# Altium PCB BEE-PC_EXP_V100.PcbDoc (part 1 of 7)
Units mm, origin at the board's own origin, x right, y up, seen from the top; angles counter-clockwise.
Board outline 180 x 79.98 mm, 6 copper layers (L1 TOP, L2 GND 1, L3 SIGNAL, L4 PWR, L5 GND 2, L6 BOT), stack 1.536 mm thick; 1146 components, 909 nets, 3933 pads, 1234 vias.
Unrouted connection lines stored in the file: 1783.
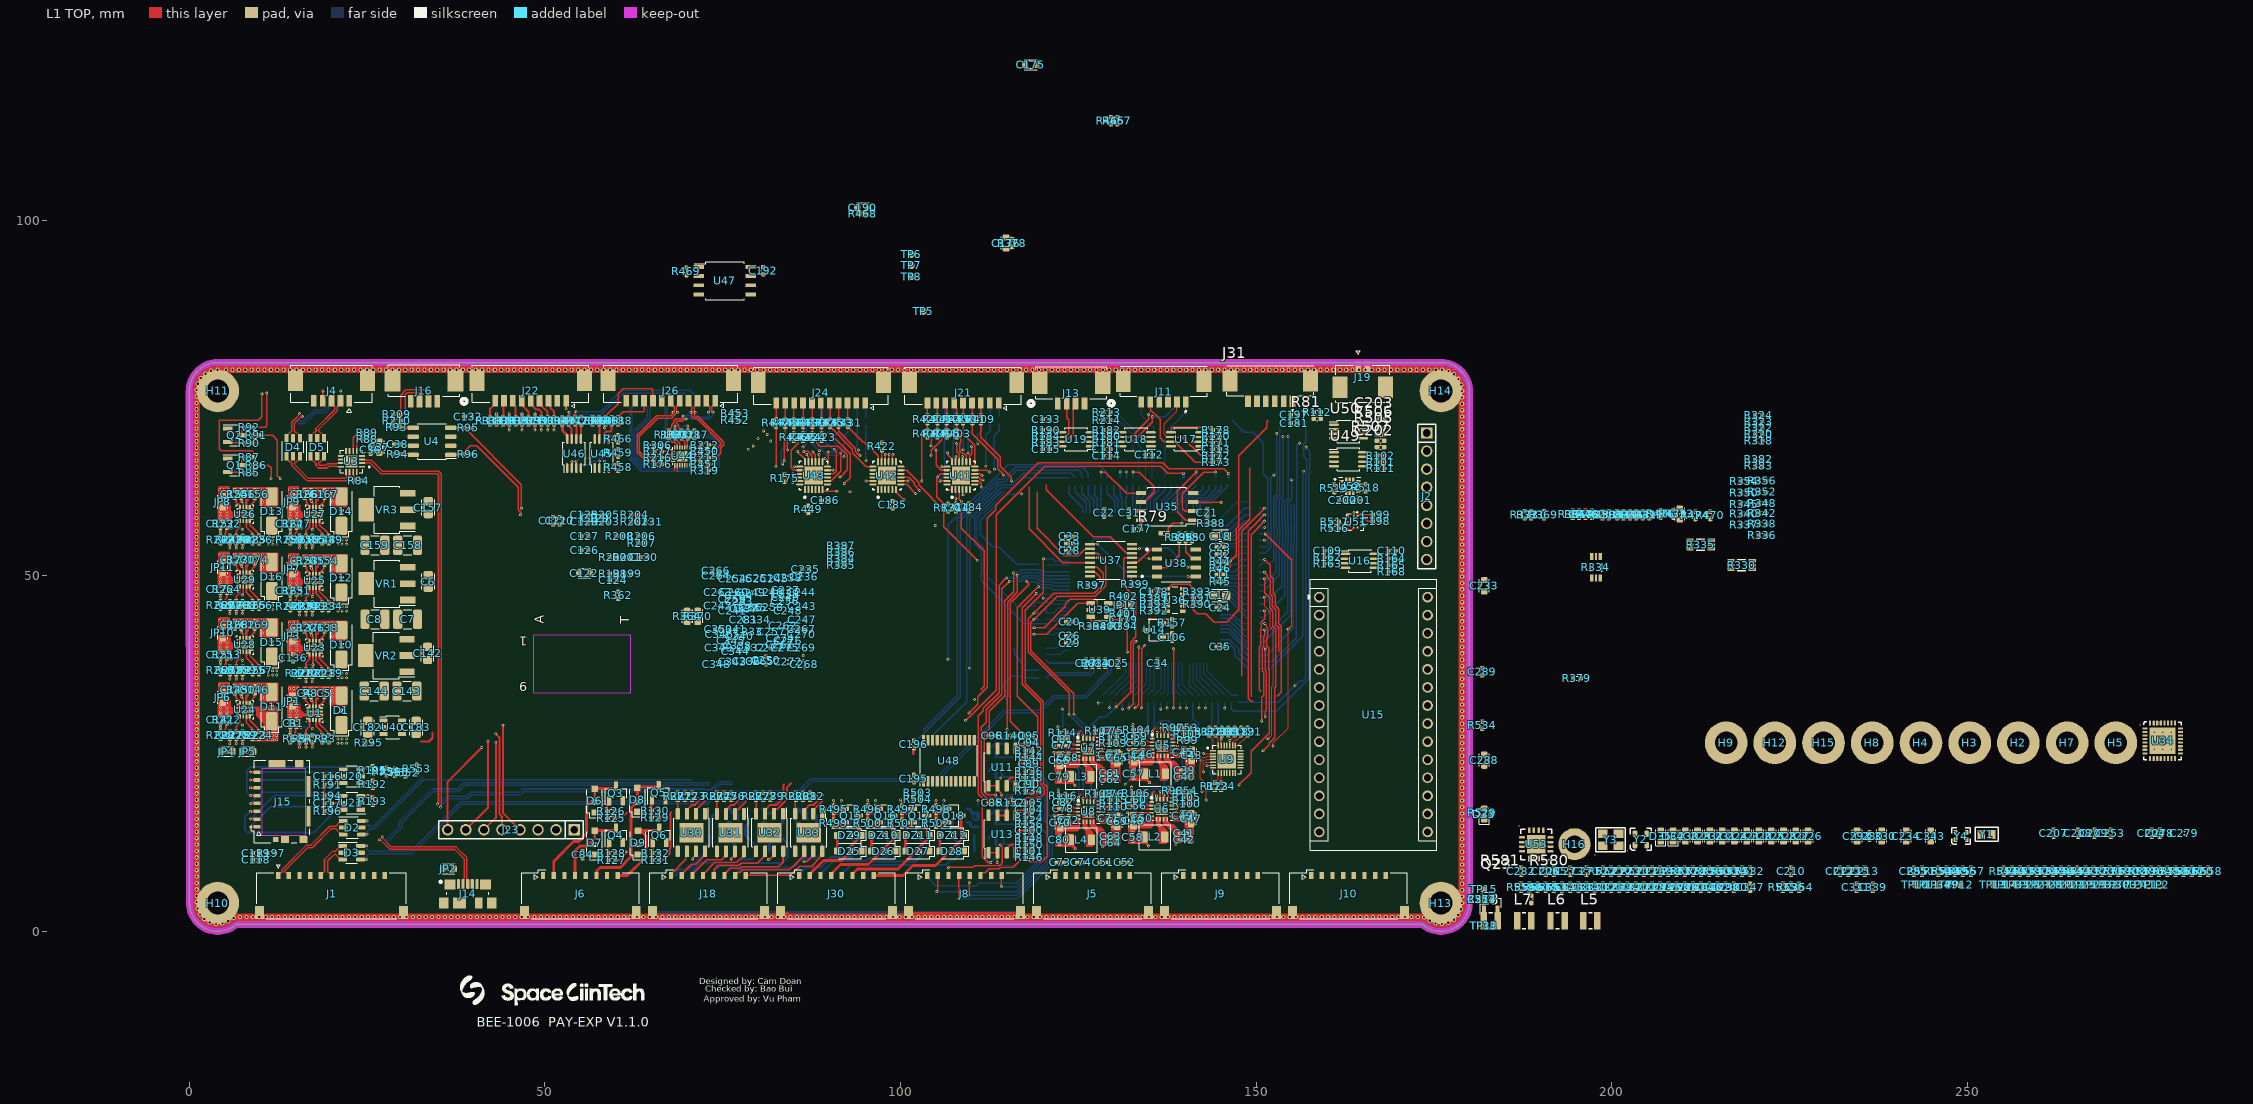
[diagram p0: L1 TOP view]
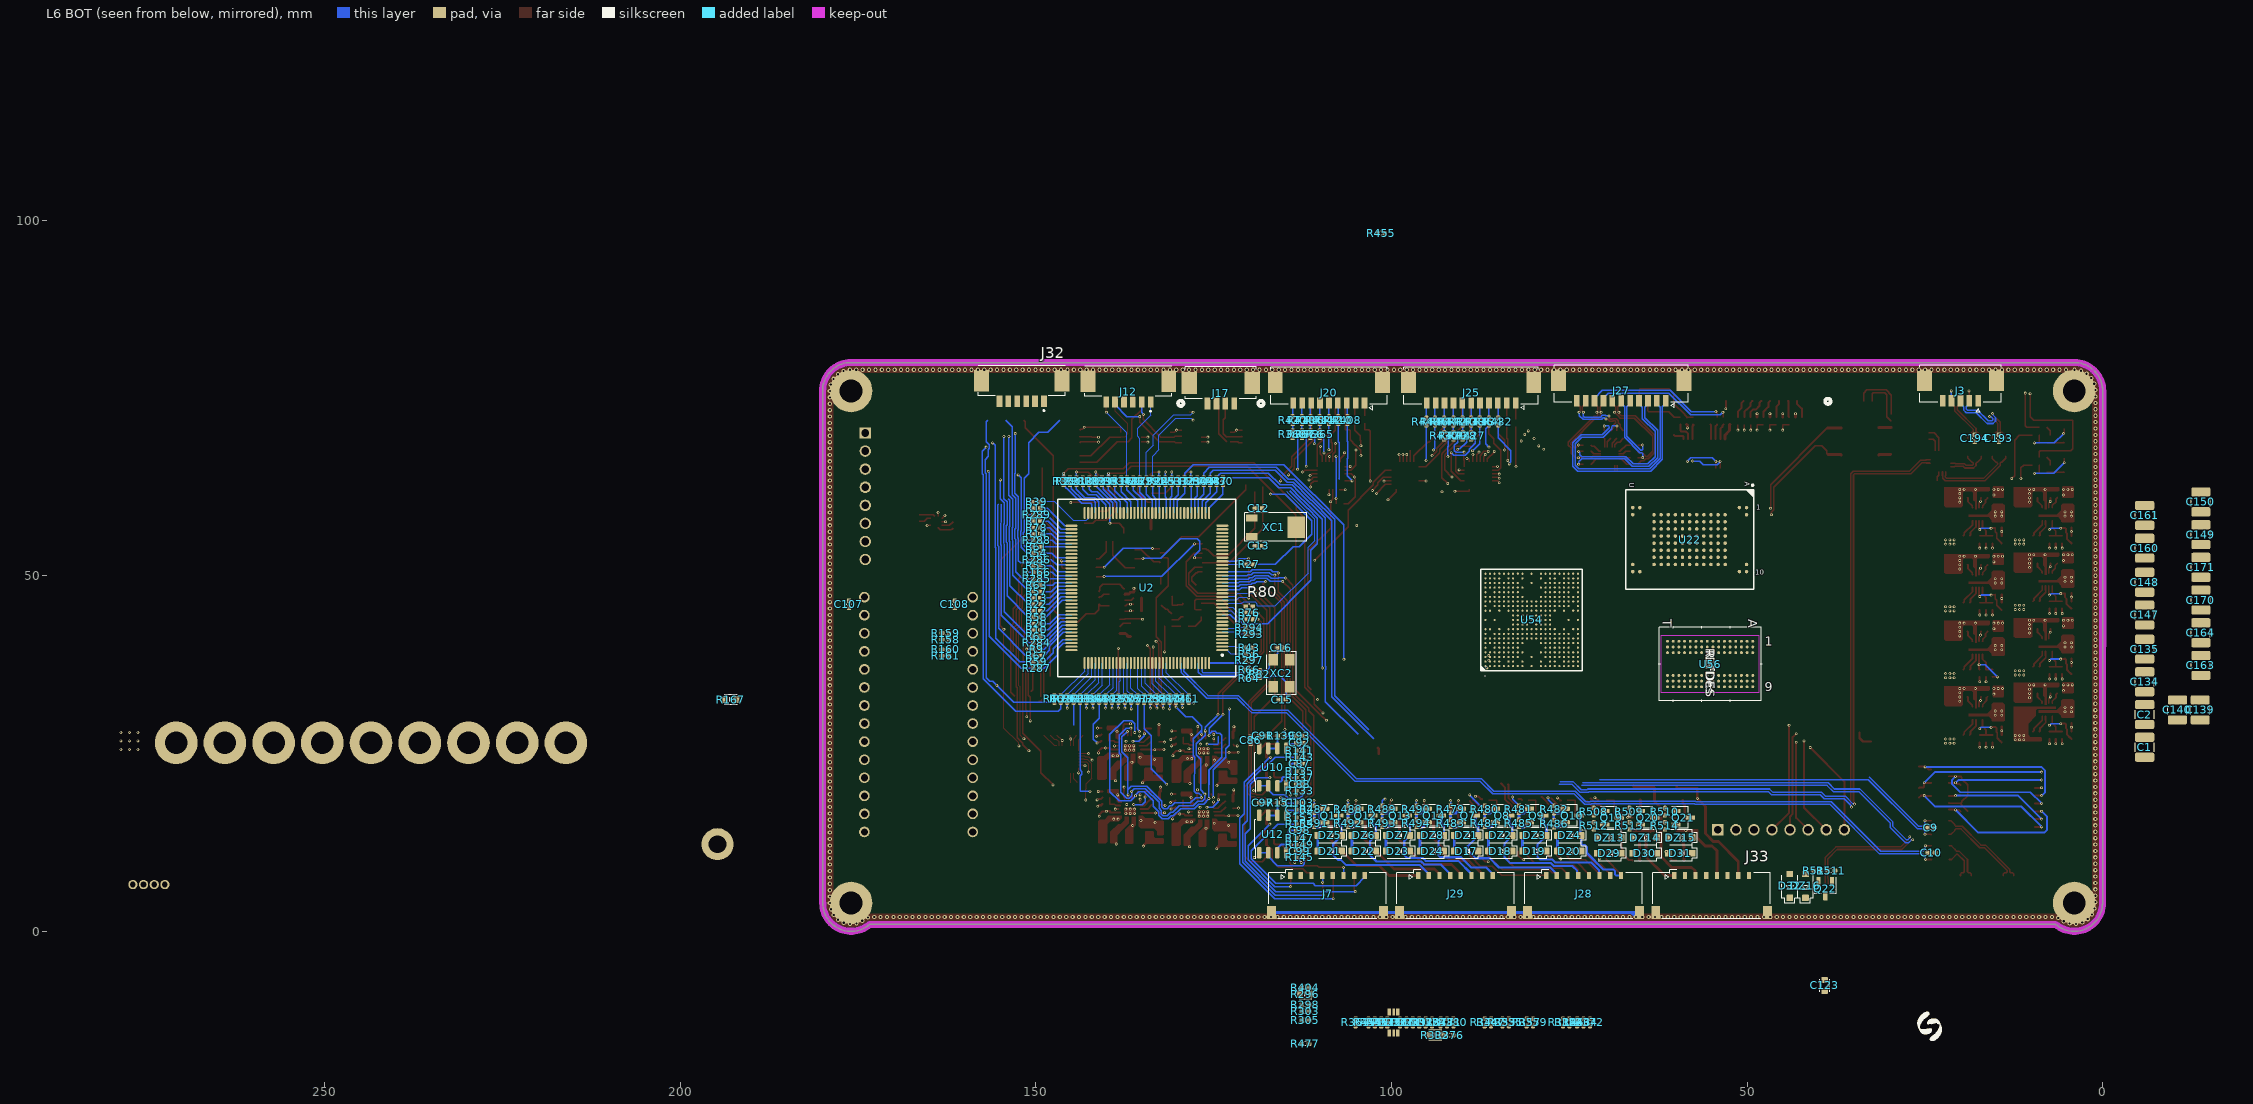
[diagram p1: L6 BOT view, seen from below]
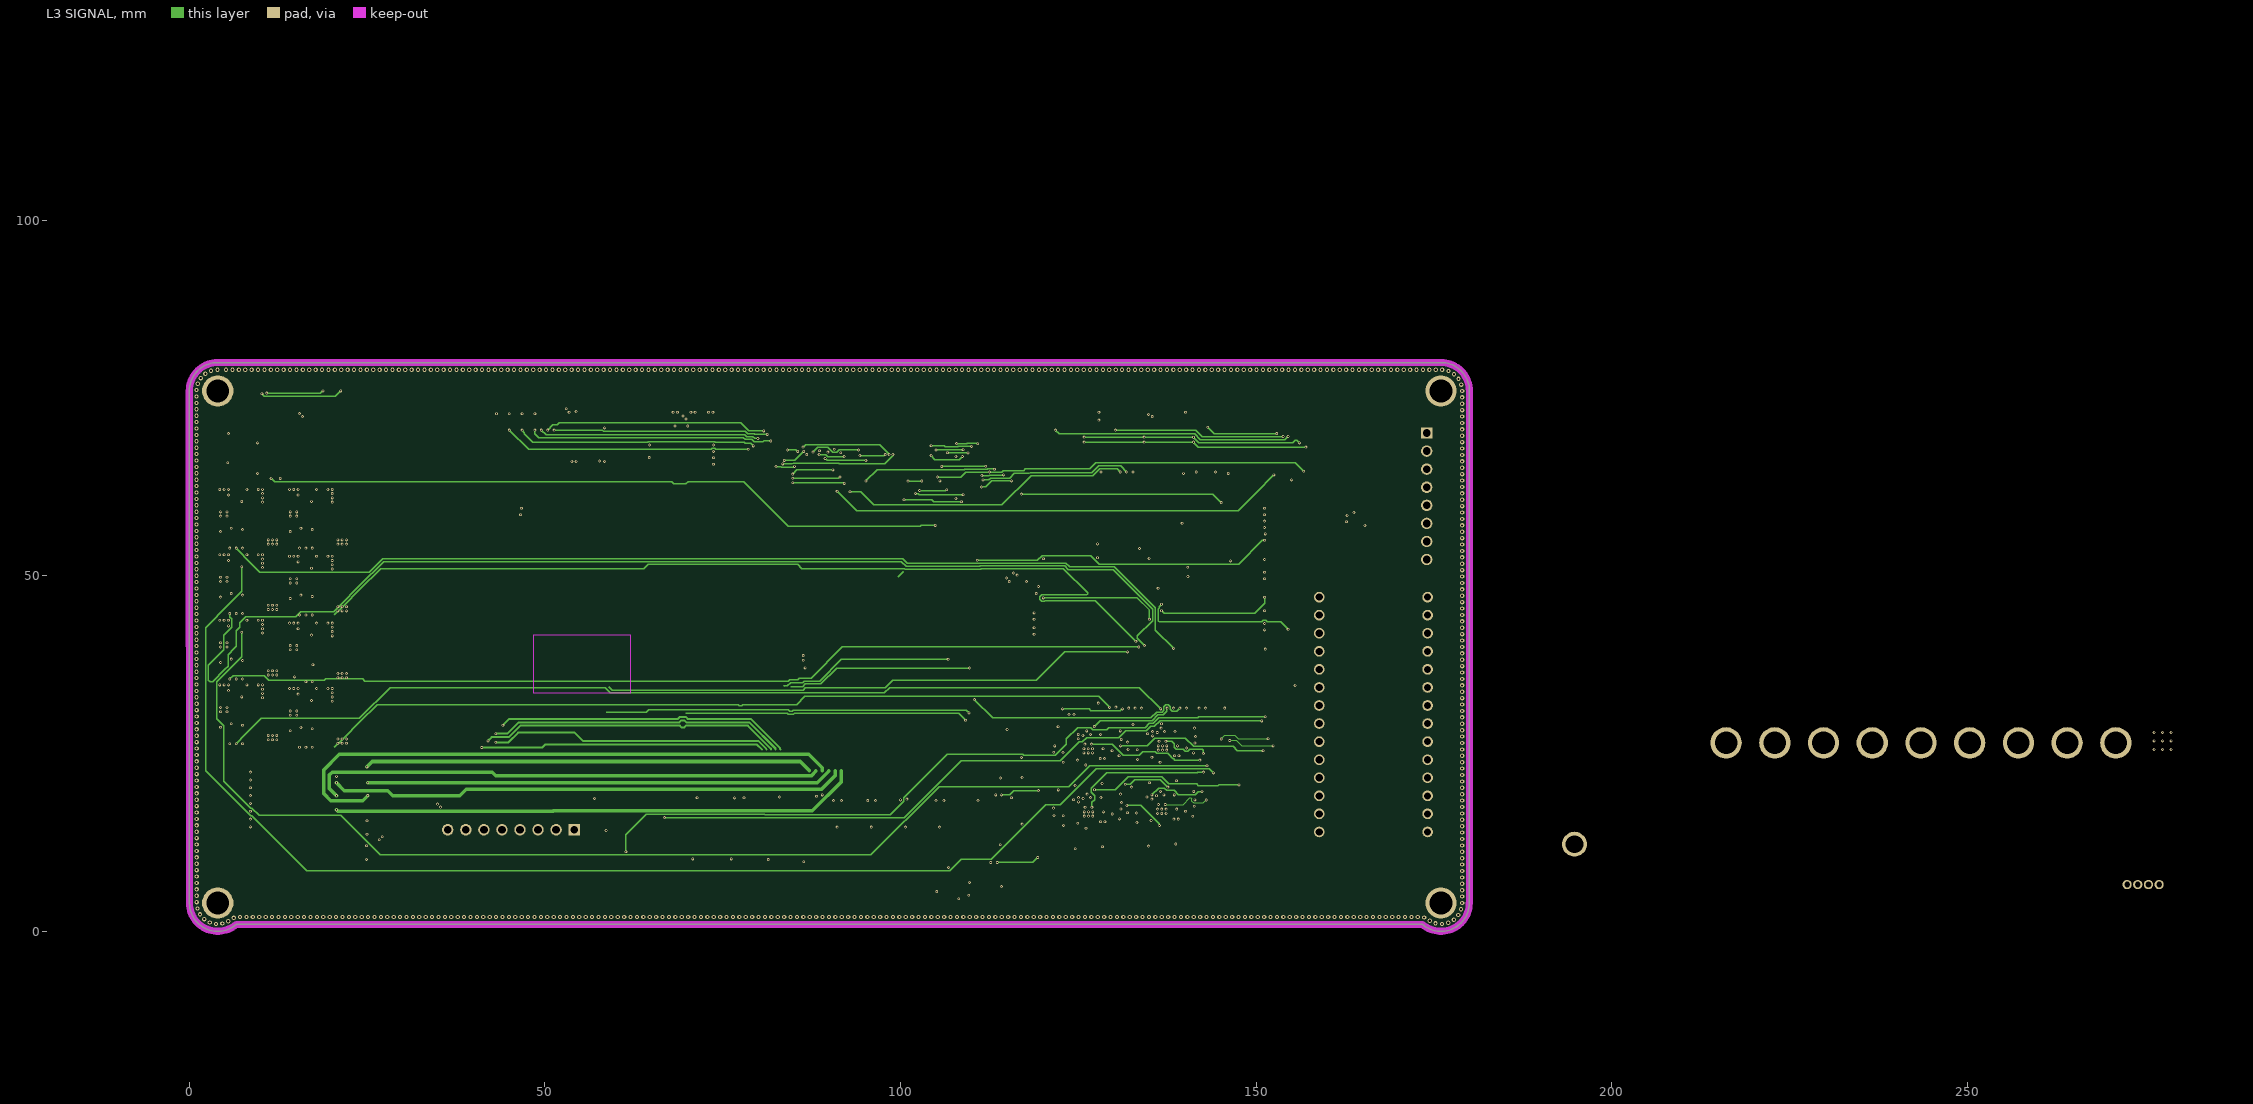
[diagram p2: L3 SIGNAL]

## Layer stack, top to bottom
Top Solder: solder mask 0.012, Solder Resist, Dk 4.3
L1 TOP: signal copper 0.018
Dielectric 4: core 0.1, PP-006, Dk 4.8
L2 GND 1: signal copper 0.035
Dielectric 2: prepreg 0.11, PP-006, Dk 4.1
L3 SIGNAL: signal copper 0.035
Dielectric 1: dielectric 0.94, FR-4, Dk 4.2
L4 PWR: signal copper 0.035
Dielectric 3: prepreg 0.11, PP-006, Dk 4.1
L5 GND 2: signal copper 0.035
Dielectric 5: core 0.1, PP-006, Dk 4.8
L6 BOT: signal copper 0.018
Bottom Solder: solder mask 0.012, Solder Resist, Dk 4.3

## Board outline
0.02,3.978 0,76 cw(c4,76) 4,80 176,80 cw(c176,76) 180,76 180,4 179.98,3.978 cw(c176,4) 173.382,1.001 173.382,1 6.618,1 6.618,1.001 cw(c4,4)
board region "Cavity : J14": 43.605,7.604 34.696,7.604 34.696,0.956 43.605,0.956
board region "Layer Stack Region 1": 0.02,3.978 0,76 0,76.262 0.068,76.782 0.204,77.289 0.405,77.773 0.667,78.227 0.986,78.643 1.357,79.014 1.773,79.333 2.227,79.595 2.711,79.796 3.218,79.932 3.738,80 4,80 176,80 176.262,80 176.782,79.932 177.289,79.796 177.773,79.595 178.227,79.333 178.643,79.014 179.014,78.643 179.333,78.227 179.595,77.773 179.796,77.289 179.932,76.782 180,76.262 180,76 180,4 179.98,3.978 179.979,3.693 179.895,3.131 179.732,2.586 179.493,2.069 179.183,1.592 178.808,1.164 178.376,0.794 177.896,0.489 177.377,0.255 176.831,0.097 176.267,0.018 175.698,0.021 175.136,0.104 174.59,0.267 174.074,0.505 173.596,0.814 173.382,1 6.618,1.001 6.404,0.814 5.926,0.505 5.41,0.267 4.864,0.104 4.302,0.021 3.733,0.018 3.169,0.097 2.623,0.255 2.104,0.489 1.624,0.794 1.192,1.164 0.817,1.592 0.507,2.069 0.268,2.586 0.105,3.131 0.021,3.693

## Design rules (kind name [scope] priority, off if disabled: settings)
BoardOutlineClearance [All] p1: gap=0.2 ignorepadtopadclearanceinfootprint=FALSE
Clearance Clearance_HD [InNetClass('HD')] p1: gap=0.6 ignorepadtopadclearanceinfootprint=FALSE
Clearance Clearance_KEEPOUT [IsKeepOut] p2: gap=0 ignorepadtopadclearanceinfootprint=FALSE
Clearance Clearance_SOM [(WithinRoom('ROOM_SOM_1')  OR WithinRoom('ROOM_SOM_2') OR WithinRoom('ROOM_USB_2'))and OnTopLayer and not InAnyDifferentialPair] p3 off: gap=0.1 ignorepadtopadclearanceinfootprint=FALSE except(0.2: SMDPad-Fill SMDPad-Poly SMDPad-Region THPad-Fill THPad-Poly THPad-Region)
Clearance [All] p4: gap=0.1 ignorepadtopadclearanceinfootprint=FALSE except(0.125: Arc-Arc Arc-Track Track-Track Track-Via; 0.15: Arc-Fill Arc-Poly Arc-Region Track-Fill Track-Poly Track-Region SMDPad-Fill Via-Fill Via-Poly Via-Region Fill-Fill Fill-Poly Fill-Region Poly-Poly Poly-Region Region-Region; 0.2: SMDPad-Poly SMDPad-Region THPad-Fill THPad-Poly THPad-Region)
ComponentClearance [All] p1: gap=0.1 collisioncheckmode=3 verticalgap=0 showdistances=FALSE
DiffPairsRouting DiffPairs_100 [InDifferentialPairClass('DIFF100')] p1: maxlimit=0.24 minlimit=0.15 mostfreqgap=0.25 toplayer_maxgap=0.15 toplayer_prefgap=0.16 toplayer_minwidth=0.18 toplayer_maxwidth=0.18 toplayer_prefwidth=0.13 midlayer2_mingap=0.18 midlayer2_maxgap=0.18 midlayer2_minwidth=0.16 midlayer2_maxwidth=0.16 midlayer2_prefwidth=0.1 midlayer3_mingap=0.18 midlayer3_maxgap=0.18 midlayer3_minwidth=0.16 midlayer3_maxwidth=0.16 midlayer3_prefwidth=0.1 bottomlayer_maxgap=0.15 bottomlayer_prefgap=0.16 bottomlayer_minwidth=0.18 bottomlayer_maxwidth=0.18 bottomlayer_prefwidth=0.13 impedanceprofiledriven=TRUE impedanceprofileid={7DCAE575-E62E-4FB4-830B-AD6A277E48F7} impedanceprofilevalue=100.000000 filterlayerstackid={D54526CB-8AD5-485F-8D58-B8B2ED083D53} maxuncoupledlength=12.7
DiffPairsRouting DiffPairs_90 [InDifferentialPairClass('DIFF90')] p2: maxlimit=0.16 minlimit=0.15 mostfreqgap=0.16 toplayer_maxgap=0.15 toplayer_minwidth=0.22 toplayer_maxwidth=0.22 toplayer_prefwidth=0.15 midlayer2_mingap=0.16 midlayer2_minwidth=0.2 midlayer2_maxwidth=0.2 midlayer2_prefwidth=0.1 midlayer3_mingap=0.16 midlayer3_minwidth=0.2 midlayer3_maxwidth=0.2 midlayer3_prefwidth=0.1 bottomlayer_maxgap=0.15 bottomlayer_minwidth=0.22 bottomlayer_maxwidth=0.22 bottomlayer_prefwidth=0.15 impedanceprofiledriven=TRUE impedanceprofileid={482B14A7-7A58-4C4E-B4EF-1ACECD4C47D5} impedanceprofilevalue=90.000000 filterlayerstackid={D54526CB-8AD5-485F-8D58-B8B2ED083D53} maxuncoupledlength=50
FanoutControl Fanout_Small [(CompPinCount < 5)] p4: bgadir=Out bgaviamode=Closest fanoutstyle=Auto fanoutdirection=OutOnly viagrid=0.025 // Fanout_Small (Default Rule)
FanoutControl Fanout_Default [All] p5: bgadir=Out bgaviamode=Centered fanoutstyle=Auto fanoutdirection=OutOnly viagrid=0.025 // Fanout_Default (Default Rule)
HoleSize [All] p1: absolutevalues=TRUE maxlimit=5 minlimit=0.025 maxpercent=80.000 minpercent=20.000
MatchedLengths "Schematic Matched Net Lengths_7" [InNetClass('DDR-ADDR-CTL')] p1: tolerance=0.254 checknetsindiffpair=FALSE checkdiffpairvsdiffpair=TRUE checkxsignals=TRUE checkothers=TRUE
MatchedLengths "Schematic Matched Net Lengths_6" [InNetClass('DDR-LANE1')] p2: tolerance=0.254 checknetsindiffpair=FALSE checkdiffpairvsdiffpair=TRUE checkxsignals=TRUE checkothers=TRUE
MatchedLengths "Schematic Matched Net Lengths_5" [InNetClass('DDR-LANE0')] p3: tolerance=0.254 checknetsindiffpair=FALSE checkdiffpairvsdiffpair=TRUE checkxsignals=TRUE checkothers=TRUE
MatchedLengths "Schematic Matched Net Lengths_4" [InDifferentialPairClass('DIFF100')] p4: tolerance=0.102 checknetsindiffpair=TRUE checkdiffpairvsdiffpair=FALSE checkxsignals=FALSE checkothers=FALSE
MatchedLengths "Schematic Matched Net Lengths_3" [InNetClass('SDMMC0')] p5: tolerance=1 checknetsindiffpair=FALSE checkdiffpairvsdiffpair=TRUE checkxsignals=TRUE checkothers=TRUE
MatchedLengths "Schematic Matched Net Lengths_2" [InNetClass('SDMMC1')] p6: tolerance=1 checknetsindiffpair=FALSE checkdiffpairvsdiffpair=TRUE checkxsignals=TRUE checkothers=TRUE
MatchedLengths CSI [InxSignalClass('xSignals_CSI')] p7: tolerance=25.4 checknetsindiffpair=FALSE checkdiffpairvsdiffpair=TRUE checkxsignals=TRUE checkothers=TRUE usedelayunits=TRUE delaytolerance=5.000000
MatchedLengths DIFF_PAIR [InDifferentialPairClass('All Differential Pairs')] p8: tolerance=25.4 checknetsindiffpair=TRUE checkdiffpairvsdiffpair=FALSE checkxsignals=FALSE checkothers=FALSE usedelayunits=TRUE delaytolerance=6.000000
MinimumSolderMaskSliver [All] p1: minsoldermaskwidth=0.12
PlaneConnect PlaneConnect_1 [InNet('GND') and IsVia] p1: planeconnectstyle=Direct reliefexpansion=0.508 reliefentries=4 reliefconductorwidth=0.254 reliefairgap=0.254
PlaneConnect [not(InNet('GND') and IsVIA)] p2: planeconnectstyle=Relief reliefexpansion=0.508 reliefentries=4 reliefconductorwidth=0.254 reliefairgap=0.254
PolygonConnect PolygonConnect_1 [(InNet('+5V_USB-Adaptor') OR InNet('+3V3_CM4') OR InNet('+5V_AUX-Adaptor'))] p1: connectstyle=Direct reliefconductorwidth=0.254 reliefentries=4 polygonreliefangle="90 Angle" airgapwidth=0.254
PolygonConnect [NOT (InComponent('U4') OR InComponent('U7'))] p2: thpad.connectstyle=Relief thpad.reliefconductorwidth=0.4 thpad.reliefentries=4 thpad.polygonreliefangle="90 Angle" thpad.airgapwidth=0.254 thpad.conductorbypadedge=TRUE thpad.mindistance=0.381 thpad.enablemindistance=FALSE smdpad.connectstyle=Relief smdpad.reliefconductorwidth=0.2 smdpad.reliefentries=4 smdpad.polygonreliefangle="90 Angle" smdpad.airgapwidth=0.15 smdpad.conductorbypadedge=TRUE smdpad.mindistance=0.381 smdpad.enablemindistance=FALSE via.connectstyle=Direct via.reliefconductorwidth=0.2 via.reliefentries=4 via.polygonreliefangle="90 Angle" via.airgapwidth=0.254
RoomDefinition ROOM_eFUSE [False] p1: confinementstyle=ConfineIn formatcopy=TRUE lockcomponents=FALSE outline 5,34.2 10.2,34.2 10.2,27.7 5,27.7
RoomDefinition ROOM_eFUSE_1 [False] p2: confinementstyle=ConfineIn formatcopy=TRUE lockcomponents=FALSE outline 5,43.3 10.2,43.3 10.2,36.8 5,36.8
RoomDefinition ROOM_eFUSE_2 [False] p3: confinementstyle=ConfineIn formatcopy=TRUE lockcomponents=FALSE outline 5,52.5 10.2,52.5 10.2,46 5,46
RoomDefinition ROOM_eFUSE_3 [False] p4: confinementstyle=ConfineIn formatcopy=TRUE lockcomponents=FALSE outline 5,61.7 10.2,61.7 10.2,55.2 5,55.2
RoomDefinition ROOM_eFUSE_4 [False] p5: confinementstyle=ConfineIn formatcopy=TRUE lockcomponents=FALSE outline 14.8,61.7 20,61.7 20,55.2 14.8,55.2
RoomDefinition ROOM_eFUSE_5 [False] p6: confinementstyle=ConfineIn formatcopy=TRUE lockcomponents=FALSE outline 14.8,52.3 20,52.3 20,45.8 14.8,45.8
RoomDefinition ROOM_eFUSE_6 [False] p7: confinementstyle=ConfineIn formatcopy=TRUE lockcomponents=FALSE outline 14.8,42.9 20,42.9 20,36.4 14.8,36.4
RoomDefinition ROOM_eFUSE_7 [False] p8: confinementstyle=ConfineIn formatcopy=TRUE lockcomponents=FALSE outline 14.8,33.7 20,33.7 20,27.2 14.8,27.2
RoutingVias [All] p1: holewidth=0.2 width=0.4 viastyle="Through Hole" minholewidth=0.2 minwidth=0.4 maxholewidth=1 maxwidth=2
SilkToSilkClearance [All] p1: silktosilkclearance=0.125
SilkToSolderMaskClearance [IsPad] p1: minsilkscreentomaskgap=0.1 clearancetoexposedcopper=TRUE
SolderMaskExpansion [All] p1: expansion=0.102 istentingtop=FALSE
SupplyNets "Schematic Supply Nets_38" [InNet('VDDCORE')] p1: voltage=0.000
SupplyNets "Schematic Supply Nets_37" [InNet('VDDIN33')] p2: voltage=0.000
SupplyNets "Schematic Supply Nets_36" [InNet('VDDANA')] p3: voltage=0.000
SupplyNets "Schematic Supply Nets_35" [InNet('VDD_3V3_MPU')] p4: voltage=0.000
SupplyNets "Schematic Supply Nets_34" [InNet('VDDIODDR')] p5: voltage=0.000
SupplyNets "Schematic Supply Nets_33" [InNet('VDD_1V15_OUT4')] p6: voltage=0.000
SupplyNets "Schematic Supply Nets_26" [InNet('+5V_SAMA7')] p7: voltage=0.000
SupplyNets "Schematic Supply Nets_25" [InNet('VDDCPU')] p8: voltage=0.000
SupplyNets "Schematic Supply Nets_24" [InNet('VDD_1V15_OUT3')] p9: voltage=0.000
SupplyNets "Schematic Supply Nets_21" [InNet('VDDUTMII')] p10: voltage=0.000
SupplyNets "Schematic Supply Nets_20" [InNet('VDD_1V35')] p11: voltage=0.000
SupplyNets "Schematic Supply Nets_9" [InNet('VDDBU')] p12: voltage=0.000
SupplyNets "Schematic Supply Nets_6" [InNet('VDD_3V3')] p13: voltage=0.000
SupplyNets "Schematic Supply Nets_5" [InNet('+3.3_VBAT')] p14: voltage=0.000
SupplyNets "Schematic Supply Nets" [InNet('+1.8V')] p15: voltage=0.000
SupplyNets "Schematic Supply Nets_32" [InNet('VLDO2')] p16: voltage=0.000
SupplyNets "Schematic Supply Nets_31" [InNet('+5V_ADT2')] p17: voltage=0.000
SupplyNets "Schematic Supply Nets_30" [InNet('SHIELD')] p18: voltage=0.000
SupplyNets "Schematic Supply Nets_27" [InNet('+5/12V_Solenoid')] p19: voltage=0.000
SupplyNets "Schematic Supply Nets_19" [InNet('+12V_ADT2')] p20: voltage=0.000
SupplyNets "Schematic Supply Nets_18" [InNet('+5V_MCU')] p21: voltage=0.000
SupplyNets "Schematic Supply Nets_16" [InNet('+VDDCORE')] p22: voltage=0.000
SupplyNets "Schematic Supply Nets_15" [InNet('+5V')] p23: voltage=0.000
SupplyNets "Schematic Supply Nets_14" [InNet('+3.3V_MCU')] p24: voltage=0.000
SupplyNets "Schematic Supply Nets_12" [InNet('+5V_USB_ADT2')] p25: voltage=0.000
SupplyNets "Schematic Supply Nets_10" [InNet('VLDO1')] p26: voltage=0.000
SupplyNets "Schematic Supply Nets_7" [InNet('+5V_USB_ADT1')] p27: voltage=0.000
SupplyNets "Schematic Supply Nets_2" [InNet('+3.3V_SOM')] p28: voltage=0.000
SupplyNets "Schematic Supply Nets_1" [InNet('+12V_Heater')] p29: voltage=0.000
SupplyNets "Schematic Supply Nets_11" [InNet('+12V_Photo')] p30: voltage=0.000
SupplyNets "Schematic Supply Nets_8" [InNet('+12V_Laser')] p31: voltage=0.000
SupplyNets "Schematic Supply Nets_28" [InNet('+5V_TEC')] p32: voltage=0.000
SupplyNets "Schematic Supply Nets_22" [InNet('+5V_HD4')] p33: voltage=0.000
SupplyNets "Schematic Supply Nets_4" [InNet('+3.3V')] p34: voltage=0.000
SupplyNets "Schematic Supply Nets_3" [InNet('GND')] p35: voltage=0.000
Width [All] p1: maxlimit=2 minlimit=0.1 preferedwidth=0.15
21 further rules are at their usual default settings.

## Classes and differential pairs
net class DIFF90: USBA_N USBA_P USBB_N USBB_P USBC_N USBC_P
net class DDR-LANE1: DDR_D8 DDR_D9 DDR_D10 DDR_D11 DDR_D12 DDR_D13 DDR_D14 DDR_D15 DDR_DQM1 DDR_DQS1_N DDR_DQS1_P
net class DDR-LANE0: DDR_D0 DDR_D1 DDR_D2 DDR_D3 DDR_D4 DDR_D5 DDR_D6 DDR_D7 DDR_DQM0 DDR_DQS0_N DDR_DQS0_P
net class DDR-ADDR-CTL: DDR_A0 DDR_A1 DDR_A2 DDR_A3 DDR_A4 DDR_A5 DDR_A6 DDR_A7 DDR_A8 DDR_A9 DDR_A10 DDR_A11 DDR_A12 DDR_A13 DDR_A14 DDR_A15 DDR_BA0 DDR_BA1 DDR_BA2 DDR_CAS DDR_CK_N DDR_CK_P DDR_CKE DDR_CS DDR_ODT DDR_RAS DDR_WE
component class 06_SAMA7G54-PIO: C289 C290 D34 D35 J23 R371 R372 R373 R374 R375 R376 R377 R378 R379 R380 R381 R382 R383 R384 R385 R386 R387 R404 R454 R455 R456 R457 R462 R463 R464 R465 R467 R468 R470 R474 R475 R476 R477 R478 R535 R536 R537 R538 R539 R540 R541 R542 R543 R544 R545 R546 R547 R548 R549 R550 R551 R552 R553 R554 R555 R556 R557 R558 R559 R560 R561 R562 R563 R564 R565 R566 R567 R568 R569 R570 R571 R572 R577 R579 U54
component class 06_SAMA7G54-MPU: C235 C236 C237 C238 C239 C240 C241 C242 C243 C244 C245 C246 C247 C248 C249 C250 C251 C252 C253 C254 C255 C256 C257 C258 C259 C260 C261 C262 C263 C264 C265 C266 C267 C268 C269 C270 C271 C272 C273 C274 C275 C276 C277 C278 C279 C280 C281 C282 C283 C284 C285 C286 C287 C288 R336 R337 R338 R339 R340 R341 R342 R343 R344 R345 R346 R347 R348 R349 R350 R351 R352 R353 R354 R355 R356 R357 R358 R359 R360 R361 R362 R363 R364 R369 R370 R580 R581 SW1 SW2 TP18 Y1 Y2 Y3 Y4
component class 06_SAMA7G54-DDR3: C292 C294 C296 C298 C300 C302 C304 C306 C308 C310 C312 C314 C316 C318 C320 C322 C324 C326 C328 C330 C331 C332 C333 C334 C335 C336 C337 C338 C339 C340 C341 C342 C343 C344 C345 C346 C347 C348 C349 C350 C353 C354 R573 R574 R575 R576 R578 TP20 TP22 TP25 TP26 TP27 TP28 TP29 TP30 TP31 TP32 TP33 TP34 U56
component class 13_Sensors_Onboard: C198 C199 C200 C201 R516 R517 R518 R519 R531 R532 R533 R534 U51 U52
component class "15_SOLENOID 2": C195 C196 D17 D18 D19 D20 D21 D22 D23 D24 D25 D26 D27 D28 D29 D30 D31 D32 DZ1 DZ2 DZ3 DZ4 DZ5 DZ6 DZ7 DZ8 DZ9 DZ10 DZ11 DZ12 DZ13 DZ14 DZ15 DZ16 J28 J29 J30 J33 Q7 Q8 Q9 Q10 Q11 Q12 Q13 Q14 Q15 Q16 Q17 Q18 Q19 Q20 Q21 Q22 R479 R480 R481 R482 R483 R484 R485 R486 R487 R488 R489 R490 R491 R492 R493 R494 R495 R496 R497 R498 R499 R500 R501 R502 R503 R504 R508 R509 R510 R511 R512 R513 R514 R515 U48
net class SDMMC0: SOM_EMMC_nRST SOM_SDMMC0_OUT_CMD SOM_SDMMC0_OUT_D0 SOM_SDMMC0_OUT_D5 SOM_SDMMC0_OUT_DS
net class DIFF100: CAM1_CK_N CAM1_CK_P CAM1_D0_N CAM1_D0_P CAM1_D1_N CAM1_D1_P CAM2_CK_N CAM2_CK_P CAM2_D0_N CAM2_D0_P CAM2_D1_N CAM2_D1_P DDR_CK_N DDR_CK_P DDR_DQS0_N DDR_DQS0_P DDR_DQS1_N DDR_DQS1_P L_CAM1_CK_N L_CAM1_CK_P L_CAM1_D0_N L_CAM1_D0_P L_CAM1_D1_N L_CAM1_D1_P L_CAM2_CK_N L_CAM2_CK_P L_CAM2_D0_N L_CAM2_D0_P L_CAM2_D1_N L_CAM2_D1_P MIPI_CK_N MIPI_CK_P MIPI_D0_N MIPI_D0_P MIPI_D1_N MIPI_D1_P SOM_CAM_CK_N SOM_CAM_CK_P SOM_CAM_D0_N SOM_CAM_D0_P SOM_CAM_D1_N SOM_CAM_D1_P
component class 06_SOM_CAM: C187 C188 C189 J26 J27 R176 R177 R187 R188 R189 R211 R212 R215 R216 R306 R308 R319 R321 R450 R451 R452 R453 R458 R459 R460 R461 R466 R471 R472 R473 U44 U45 U46
component class 04_CONNECTOR_OUT_2: C184 C185 C186 J20 J21 J24 J25 R174 R175 R314 R365 R366 R367 R368 R403 R405 R406 R407 R408 R409 R410 R411 R412 R413 R414 R415 R416 R417 R418 R419 R420 R421 R422 R423 R424 R425 R426 R427 R428 R429 R430 R431 R432 R433 R434 R435 R436 R437 R438 R439 R440 R441 R442 R443 R444 R445 R446 R447 R448 R449 U41 U42 U43
net class SDMMC1: SD2_DATA2
net class 50_eMMC1_MCU: SOM_SDMMC0_OUT_CK SOM_SDMMC0_OUT_CMD SOM_SDMMC0_OUT_D0 SOM_SDMMC0_OUT_D1 SOM_SDMMC0_OUT_D2 SOM_SDMMC0_OUT_D3 SOM_SDMMC0_OUT_D4 SOM_SDMMC0_OUT_D5 SOM_SDMMC0_OUT_D6 SOM_SDMMC0_OUT_D7
component class 15_SOLEDNOID: J18 R271 R272 R273 R274 R275 R276 R277 R278 R279 R280 R281 R282 U30 U31 U32 U33
component class 09_MRAM_RTC_WDT: C177 C178 C179 C180 C191 J19 JP12 R388 R389 R390 R391 R392 R393 R394 R395 R396 R397 R398 R399 R400 R401 R402 R529 R530 U35 U36 U37 U38 U39
component class 07_eMMC: C120 C121 C122 C123 C124 C125 C126 C127 C128 C129 C130 C131 R198 R199 R200 R201 R202 R203 R204 R205 R206 R207 R208 U22
component class 06_SAMA7G54-PMIC: a C175 C176 C190 C220 C221 C222 C223 C224 C225 C226 C227 C228 C229 C230 C231 C232 C233 C234 L5 L6 L7 L8 Q23 R167 R296 R298 R303 R304 R305 R310 R312 R318 R320 R322 R323 R324 R325 R326 R327 R328 R329 R330 R331 R332 R333 R334 R335 TP5 TP6 TP7 TP8 TP9 TP10 TP11 TP12 TP13 TP14 TP15 U34 U53
component class 05_POWER: C1 C2 C3 C4 C5 C6 C7 C8 D1 JP1 R1 R2 R3 R4 R5 R6 R7 R8 U1 VR1
component class MOUTING: H2 H3 H4 H5 H7 H8 H9 H10 H11 H12 H13 H14 H15
component class 14_HD4_PUMP: C107 C108 C109 C110 J9 J10 R158 R159 R160 R161 R162 R163 R164 R165 R168 U15 U16
net class HD: HD4_CH11+ HD4_CH11- HD4_CH12+ HD4_CH12- HD4_CH21+ HD4_CH21- HD4_CH22+ HD4_CH22- HD4_CH31+ HD4_CH31- HD4_CH32+ HD4_CH32- HD4_CH41+ HD4_CH41- HD4_CH42+ HD4_CH42-
differential pair class DIFF100: CAM1_CK CAM1_D0 CAM1_D1 CAM2_CK CAM2_D0 CAM2_D1 CAM_CK CAM_D0 CAM_D1 DDR_CK DDR_DQS0 DDR_DQS1 L_CAM1_CK L_CAM1_D0 L_CAM1_D1 L_CAM2_CK L_CAM2_D0 L_CAM2_D1 MIPI_CK MIPI_D0 MIPI_D1 SOM_CAM_CK SOM_CAM_D0 SOM_CAM_D1
component class 05_POWER_2: C134 C135 C136 C137 C138 C139 C140 C141 C142 C143 C144 C145 C146 C147 C148 C149 C150 C151 C152 C153 C154 C155 C156 C157 C158 C159 C160 C161 C162 C163 C164 C165 C166 C167 C168 C169 C170 C171 C172 C173 C174 C182 C183 D10 D11 D12 D13 D14 D15 D16 JP3 JP4 JP5 JP6 JP7 JP8 JP9 JP10 JP11 R217 R218 R219 R220 R221 R222 R223 R224 R225 R226 R227 R228 R229 R230 R231 R232 R233 R234 R235 R236 R237 R238 R239 R240 R241 R242 R243 R244 R245 R246 R247 R248 R249 R250 R251 R252 R253 R254 R255 R256 R257 R258 R259 R260 R261 R262 R263 R264 R265 R266 R267 R268 R269 R270 R295 TP3 TP4 U23 U24 U25 U26 U27 U28 U29 U40 VR2 VR3
component class 06_SOM_Console: C132 C133 J16 J17 R209 R210 R213 R214
component class 04_CONNECTOR_OUT: J22 R299 R300 R301 R302 R307 R309 R311 R313 R315 R316 R317
differential pair class DIFF90: ADT1_USB2.0 ADT1_USB_D ADT2_USB2.0 ADT2_USB_D BOOT_USB_D CONN_USB CONN_USB_1 CONN_USB_1_R CONN_USB_2 CONN_USB_2_R CONN_USB_3 CONN_USB_3_R CONN_USB_4 CONN_USB_4_R CONSOLE_1 CONSOLE_2 CONSOLE_USB SOM_USB SOM_USB_USB2 USB1 USB_D USBA USBB USBC
component class 06_SOM_USB_CARD: C116 C117 C118 C119 C192 J14 J15 JP2 R191 R192 R193 R194 R195 R196 R197 R469 U20 U21 U47
component class 04_CONNECTOR_IN: C9 C10 D2 D3 H16 J1
component class 12_TEC: C39 C40 C41 C42 C43 C44 C45 C46 C47 C48 C49 C50 C51 C52 C53 C54 C55 C56 C57 C58 C59 C60 C61 C62 C63 C64 C65 C66 C67 C68 C69 C70 C71 C72 C73 C74 C75 C76 C77 C78 C79 C80 C81 C82 C83 J5 L1 L2 L3 L4 R97 R98 R103 R105 R107 R108 R113 R115 R117 R118 R119 R120 R121 R122 U5 U6 U7 U8 U9
component class 08_MCU: C11 C12 C13 C14 C15 C16 C17 C18 C19 C20 C21 C22 C23 C24 C25 C26 C27 C28 C29 C30 C31 C32 C33 C34 C35 C204 C205 C206 C207 C208 C209 C210 C211 C212 C213 C214 C215 C216 C217 C218 C219 D33 J2 JP? R9 R10 R11 R12 R13 R14 R15 R16 R17 R18 R19 R20 R21 R22 R23 R24 R25 R26 R27 R28 R29 R30 R31 R32 R33 R34 R35 R36 R37 R38 R39 R40 R41 R42 R43 R44 R45 R46 R47 R48 R49 R50 R51 R52 R53 R54 R55 R56 R57 R58 R59 R60 R61 R62 R63 R64 R65 R66 R67 R68 R69 R70 R71 R72 R73 R74 R75 R76 R77 R78 R79 R80 R82 R83 R99 R100 R104 R106 R109 R110 R114 R116 R123 R124 R166 R185 R186 R283 R284 R285 R286 R287 R288 R289 R290 R291 R292 R293 R294 R297 R520 R521 R522 R523 R524 R525 R526 R527 R528 TP1 TP2 TVS? U2 XC1 XC2
component class 10_NTC_TEMPSENSOR: C85 C86 C87 C88 C89 C90 C91 C92 C93 C94 C95 C96 C97 C98 C99 C100 C101 C102 C103 C104 C105 C106 J7 J8 R133 R134 R135 R136 R137 R138 R139 R140 R141 R142 R143 R144 R145 R146 R147 R148 R149 R150 R151 R152 R153 R154 R155 R156 R157 U10 U11 U12 U13 U14
component class 07_USB: C36 C37 C38 C193 C194 D4 D5 J3 J4 Q1 Q2 R84 R85 R86 R87 R88 R89 R90 R91 R92 R93 R94 R95 R96 U3 U4
component class 13_FLOW_Sensor: C111 C112 C113 C114 C115 C181 C197 C202 C203 J11 J12 J13 J31 J32 R81 R101 R102 R111 R112 R169 R170 R171 R172 R173 R178 R179 R180 R181 R182 R183 R184 R190 R505 R506 R507 U17 U18 U19 U49 U50
component class 11_HEATER: C84 D6 D7 D8 D9 J6 Q3 Q4 Q5 Q6 R125 R126 R127 R128 R129 R130 R131 R132
differential pair USBA: +USBA_P -USBA_N
differential pair SENSE4: +SENSE4_P -SENSE4_N
differential pair SENSE3: +SENSE3_P -SENSE3_N
differential pair SENSE2: +SENSE2_P -SENSE2_N
differential pair SENSE1: +SENSE1_P -SENSE1_N
differential pair MIPI_D1: +MIPI_D1_P -MIPI_D1_N
differential pair MIPI_D0: +MIPI_D0_P -MIPI_D0_N
differential pair MIPI_CK: +MIPI_CK_P -MIPI_CK_N
differential pair DDR_DQS1: +DDR_DQS1_P -DDR_DQS1_N
differential pair DDR_DQS0: +DDR_DQS0_P -DDR_DQS0_N
differential pair DDR_CK: +DDR_CK_P -DDR_CK_N
differential pair L_CAM2_D1: +L_CAM2_D1_P -L_CAM2_D1_N
differential pair L_CAM2_D0: +L_CAM2_D0_P -L_CAM2_D0_N
differential pair L_CAM2_CK: +L_CAM2_CK_P -L_CAM2_CK_N
differential pair L_CAM1_D1: +L_CAM1_D1_P -L_CAM1_D1_N
differential pair L_CAM1_D0: +L_CAM1_D0_P -L_CAM1_D0_N
differential pair L_CAM1_CK: +L_CAM1_CK_P -L_CAM1_CK_N
differential pair USB1: +USB1_P -USB1_N
differential pair USBC: +USBC_P -USBC_N
differential pair USBB: +USBB_P -USBB_N
differential pair CAM2_D1: +CAM2_D1_P -CAM2_D1_N
differential pair CAM2_D0: +CAM2_D0_P -CAM2_D0_N
differential pair CAM2_CK: +CAM2_CK_P -CAM2_CK_N
differential pair CAM1_D1: +CAM1_D1_P -CAM1_D1_N
differential pair CAM1_D0: +CAM1_D0_P -CAM1_D0_N
differential pair CAM1_CK: +CAM1_CK_P -CAM1_CK_N
differential pair SOM_USB: +SOM_USB_P -SOM_USB_N
differential pair ADT2_USB_D: +ADT2_USB_D_P -ADT2_USB_D_N
differential pair ADT2_USB2.0: +ADT2_USB2.0_P -ADT2_USB2.0_N
differential pair ADT1_USB_D: +ADT1_USB_D_P -ADT1_USB_D_N
differential pair ADT1_USB2.0: +ADT1_USB2.0_P -ADT1_USB2.0_N
differential pair SOM_CAM_D1: +SOM_CAM_D1_P -SOM_CAM_D1_N
differential pair SOM_CAM_D0: +SOM_CAM_D0_P -SOM_CAM_D0_N
differential pair SOM_CAM_CK: +SOM_CAM_CK_P -SOM_CAM_CK_N
differential pair CONN_USB_2: +CONN_USB_2_P -CONN_USB_2_N
differential pair CONN_USB_2_R: +CONN_USB_2_R_P -CONN_USB_2_R_N
differential pair CONN_USB_1: +CONN_USB_1_P -CONN_USB_1_N
differential pair CONN_USB_1_R: +CONN_USB_1_R_P -CONN_USB_1_R_N

## Components (designator, comment, footprint, x,y, rotation, side; value= is the part's Value field where it differs from the comment)
C1 "47uF/25V" CAP_C_3225X80 -5.9,25.9 r90 bottom
C2 "47uF/25V" CAP_C_3225X80 -5.9,30.5 r270 bottom
C3 "1uF/20V" CAP_C_1005X60 14.2,29.3 r90 top
C4 "2.2nF/10V" CAP_C_1005X60 16.2,33.5 r270 top
C5 "2.2nF/10V" CAP_C_1005X60 19,33.5 r270 top
C6 "10uF/20V" CAP_C_2012X110 33.6,49.2 r270 top
C7 "47uF/25V" CAP_C_3225X80 30.7,43.9 r180 top
C8 "47uF/25V" CAP_C_3225X80 26.1,43.9 r0 top
C9 "0.1uF/10V" CAP_C_1005X60 24.155,14.6 r0 bottom
C10 "0.1uF/10V" CAP_C_1005X60 24.079,11.07 r0 bottom
C11 "0.1uF/10V" CAP_C_1005X60 145,50.2 r180 top
C12 "4.7pF/10V" CAP_C_1005X60 118.7,59.5 r0 bottom
C13 "4.7pF/10V" CAP_C_1005X60 118.7,54.2 r0 bottom
C14 "12pF/10V" CAP_C_1005X60 127.9,37.7 r270 top
C15 "12pF/10V" CAP_C_1005X60 115.375,32.6 r180 bottom
C16 "12pF/10V" CAP_C_1005X60 115.475,39.9 r0 bottom
C17 "10uF/20V" CAP_C_2012X110 144.9,47.25 r180 top
C18 "10uF/20V" CAP_C_2012X110 145,55.55 r180 top
C19 "0.1uF/10V" CAP_C_1005X60 123.8,54.55 r180 top
C20 "0.1uF/10V" CAP_C_1005X60 123.8,43.55 r180 top
C21 "0.1uF/10V" CAP_C_1005X60 143.15,58.85 r90 top
C22 "0.1uF/10V" CAP_C_1005X60 128.65,58.85 r90 top
C23 "0.1uF/10V" CAP_C_1005X60 145,54.05 r0 top
C24 "0.1uF/10V" CAP_C_1005X60 145,45.55 r0 top
C25 "0.1uF/10V" CAP_C_1005X60 130.65,37.7 r270 top
C26 "0.1uF/10V" CAP_C_1005X60 123.8,41.55 r180 top
C27 "0.1uF/10V" CAP_C_1005X60 126.1,37.7 r270 top
C28 "0.1uF/10V" CAP_C_1005X60 123.8,53.55 r180 top
C29 "0.1uF/10V" CAP_C_1005X60 123.8,40.55 r180 top
C30 "0.1uF/10V" CAP_C_1005X60 128.8,37.7 r270 top
C31 "0.1uF/10V" CAP_C_1005X60 132.15,58.85 r90 top
C32 "0.1uF/10V" CAP_C_1005X60 145,53.05 r0 top
C33 "0.1uF/10V" CAP_C_1005X60 123.8,55.55 r180 top
C34 "0.1uF/10V" CAP_C_1005X60 136.15,37.7 r270 top
C35 "0.1uF/10V" CAP_C_1005X60 145,40.05 r0 top
C36 "0.1uF/10V" CAP_C_1005X60 25.5,67.7 r270 top
C37 "4.7uF/10V" CAP_C_1608X80 26.7,68.1 r270 top
C38 "0.1uF/10V" CAP_C_1005X60 29.3,68.5 r0 top
C39 "47nF/10V" CAP_C_1005X60 139.975,22.675 r180 top
C40 "47nF/10V" CAP_C_1005X60 139.975,21.775 r180 top
C41 "47nF/10V" CAP_C_1005X60 139.875,13.775 r180 top
C42 "47nF/10V" CAP_C_1005X60 139.875,12.875 r180 top
C43 "4.7uF/10V" CAP_C_1608X80 140.95,24.787 r90 top
C44 "4.7uF/10V" CAP_C_1608X80 132.875,24.55 r90 top
C45 "0.1uF/10V" CAP_C_1005X60 139.75,25.187 r90 top
C46 "0.1uF/10V" CAP_C_1005X60 134.075,24.95 r90 top
C47 "4.7uF/10V" CAP_C_1608X80 140.875,15.875 r90 top
C48 "4.7uF/10V" CAP_C_1608X80 132.775,15.55 r90 top
C49 "0.1uF/10V" CAP_C_1005X60 139.675,16.275 r90 top
C50 "0.1uF/10V" CAP_C_1005X60 133.975,15.95 r90 top
C51 "47nF/10V" CAP_C_1005X60 128.525,9.7 r180 top
C52 "47nF/10V" CAP_C_1005X60 131.525,9.7 r180 top
C53 "0.1uF/10V" CAP_C_1005X60 140.375,28.65 r180 top
C54 "0.1uF/10V" CAP_C_1005X60 140.275,19.75 r180 top
C55 "0.1uF/10V" CAP_C_1005X60 133.275,26.55 r0 top
C56 "0.1uF/10V" CAP_C_1005X60 133.175,17.65 r0 top
C57 "1uF/10V" CAP_C_1005X60 132.775,22.15 r270 top
C58 "1uF/10V" CAP_C_1005X60 132.675,13.25 r270 top
C59 "1uF/10V" CAP_C_1005X60 133.275,27.45 r0 top
C60 "1uF/10V" CAP_C_1005X60 133.175,18.55 r0 top
C61 "47nF/10V" CAP_C_1005X60 129.525,22.275 r180 top
C62 "47nF/10V" CAP_C_1005X60 129.525,21.375 r180 top
C63 "47nF/10V" CAP_C_1005X60 129.561,13.393 r180 top
C64 "47nF/10V" CAP_C_1005X60 129.561,12.493 r180 top
C65 "4.7uF/10V" CAP_C_1608X80 130.5,24.425 r90 top
C66 "4.7uF/10V" CAP_C_1608X80 122.425,24.05 r90 top
C67 "0.1uF/10V" CAP_C_1005X60 129.3,24.825 r90 top
C68 "0.1uF/10V" CAP_C_1005X60 123.625,24.45 r90 top
C69 "4.7uF/10V" CAP_C_1608X80 130.461,15.493 r90 top
C70 "4.7uF/10V" CAP_C_1608X80 122.461,15.268 r90 top
C71 "0.1uF/10V" CAP_C_1005X60 129.261,15.893 r90 top
C72 "0.1uF/10V" CAP_C_1005X60 123.661,15.668 r90 top
C73 "47nF/10V" CAP_C_1005X60 122.5,9.7 r180 top
C74 "47nF/10V" CAP_C_1005X60 125.4,9.7 r180 top
C75 "0.1uF/10V" CAP_C_1005X60 129.925,28.25 r180 top
C76 "0.1uF/10V" CAP_C_1005X60 129.961,19.368 r180 top
C77 "0.1uF/10V" CAP_C_1005X60 122.825,26.15 r0 top
C78 "0.1uF/10V" CAP_C_1005X60 122.861,17.268 r0 top
C79 "1uF/10V" CAP_C_1005X60 122.325,21.75 r270 top
C80 "1uF/10V" CAP_C_1005X60 122.361,12.868 r270 top
C81 "1uF/10V" CAP_C_1005X60 122.825,27.05 r0 top
C82 "1uF/10V" CAP_C_1005X60 122.861,18.168 r0 top
C83 "0.1uF/10V" CAP_C_1005X60 146.1,28.1 r270 top
C84 "1uF/20V" CAP_C_1005X60 55.3,10.8 r270 top
C85 "0.1uF/10V" CAP_C_1005X60 112.9,18.1 r180 top
C86 "1uF/20V" CAP_C_1005X60 119.8,26.9 r90 bottom
C87 "0.1uF/10V" CAP_C_1005X60 112.9,23.6 r0 bottom
C88 "0.1uF/10V" CAP_C_1005X60 112.9,20.7 r0 bottom
C89 "0.1uF/10V" CAP_C_1005X60 118.1,23.6 r180 top
C90 "0.1uF/10V" CAP_C_1005X60 118.1,20.7 r180 top
C91 "0.1uF/10V" CAP_C_1005X60 118.1,27.5 r0 bottom
C92 "0.1uF/10V" CAP_C_1005X60 112.9,26.5 r0 bottom
C93 "0.1uF/10V" CAP_C_1005X60 112.9,27.5 r0 bottom
C94 "0.1uF/10V" CAP_C_1005X60 118.1,26.5 r180 top
C95 "0.1uF/10V" CAP_C_1005X60 118.1,27.5 r180 top
C96 "0.1uF/10V" CAP_C_1005X60 112.9,27.5 r180 top
C97 "0.1uF/10V" CAP_C_1005X60 118.1,18.1 r0 bottom
C98 "0.1uF/10V" CAP_C_1005X60 112.9,14.2 r0 bottom
C99 "0.1uF/10V" CAP_C_1005X60 112.9,11.3 r0 bottom
C100 "0.1uF/10V" CAP_C_1005X60 118.1,14.2 r180 top
C101 "0.1uF/10V" CAP_C_1005X60 118.1,11.3 r180 top
C102 "0.1uF/10V" CAP_C_1005X60 112.9,17.1 r0 bottom
C103 "0.1uF/10V" CAP_C_1005X60 112.9,18.1 r0 bottom
C104 "0.1uF/10V" CAP_C_1005X60 118.1,17.1 r180 top
C105 "0.1uF/10V" CAP_C_1005X60 118.1,18.1 r180 top
C106 "0.1uF/10V" CAP_C_1005X60 138.2,41.4 r90 top
C107 "0.1uF/10V" CAP_C_1005X60 176.3,46 r90 bottom
C108 "0.1uF/10V" CAP_C_1005X60 161.4,46 r270 bottom
C109 "0.1uF/10V" CAP_C_1005X60 160.1,53.5 r0 top
C110 "0.1uF/10V" CAP_C_1005X60 169.1,53.5 r180 top
C111 "0.1uF/10V" CAP_C_1005X60 129,67.8 r0 top
C112 "0.1uF/10V" CAP_C_1005X60 135,67 r0 top
C113 "0.1uF/10V" CAP_C_1005X60 144.4,67.8 r180 top
C114 "0.1uF/10V" CAP_C_1005X60 129,66.9 r180 top
C115 "0.1uF/10V" CAP_C_1005X60 120.482,67.8 r0 top
C116 "0.1uF/10V" CAP_C_1005X60 19.5,21.8 r0 top
C117 "0.1uF/10V" CAP_C_1005X60 19.5,18 r0 top
C118 "1uF/10V" CAP_C_1005X60 9.4,10.088 r0 top
C119 "0.1uF/10V" CAP_C_1005X60 9.4,10.988 r0 top
C120 "1uF/20V" CAP_C_1005X60 52.074,57.734 r270 top
C121 "0.1uF/10V" CAP_C_1005X60 51.174,57.734 r270 top
C122 "4.7uF/10V" CAP_C_1608X80 55.571,50.4 r180 top
C123 "4.7uF/10V" CAP_C_1608X80 39.1,-7.6 r90 bottom
C124 "0.1uF/10V" CAP_C_1005X60 59.624,49.4 r0 top
C125 "0.1uF/10V" CAP_C_1005X60 55.624,58.6 r180 top
C126 "0.1uF/10V" CAP_C_1005X60 55.586,53.6 r180 top
C127 "0.1uF/10V" CAP_C_1005X60 55.586,55.6 r180 top
C128 "0.1uF/10V" CAP_C_1005X60 55.586,57.6 r180 top
C129 "0.1uF/10V" CAP_C_1005X60 57.124,58.1 r270 top
C130 "0.1uF/10V" CAP_C_1005X60 63.924,52.6 r180 top
C131 "0.1uF/10V" CAP_C_1005X60 64.624,57.6 r180 top
C132 "0.1uF/10V" CAP_C_1005X60 39.2,72.4 r180 top
C133 "0.1uF/10V" CAP_C_1005X60 120.5,72 r0 top
C134 "47uF/25V" CAP_C_3225X80 -5.9,35.1 r90 bottom
C135 "47uF/25V" CAP_C_3225X80 -5.9,39.7 r270 bottom
C136 "1uF/20V" CAP_C_1005X60 14.6,38.5 r90 top
C137 "2.2nF/10V" CAP_C_1005X60 16.2,42.7 r270 top
C138 "2.2nF/10V" CAP_C_1005X60 19,42.7 r270 top
C139 "47uF/25V" CAP_C_3225X80 -13.7,31.146 r270 bottom
C140 "47uF/25V" CAP_C_3225X80 -10.5,31.146 r270 bottom
C141 "1uF/20V" CAP_C_1005X60 4.4,29.8 r90 top
C142 "10uF/20V" CAP_C_2012X110 33.5,39.1 r270 top
C143 "47uF/25V" CAP_C_3225X80 30.6,33.8 r180 top
C144 "47uF/25V" CAP_C_3225X80 26,33.8 r0 top
C145 "2.2nF/10V" CAP_C_1005X60 6.4,34 r270 top
C146 "2.2nF/10V" CAP_C_1005X60 9.2,34 r270 top
C147 "47uF/25V" CAP_C_3225X80 -5.9,44.5 r90 bottom
C148 "47uF/25V" CAP_C_3225X80 -5.9,49.1 r270 bottom
C149 "47uF/25V" CAP_C_3225X80 -13.8,55.8 r90 bottom
C150 "47uF/25V" CAP_C_3225X80 -13.8,60.4 r270 bottom
C151 "1uF/20V" CAP_C_1005X60 4.4,38.9 r90 top
C152 "1uF/20V" CAP_C_1005X60 4.4,57.3 r90 top
C153 "2.2nF/10V" CAP_C_1005X60 16.2,52.1 r270 top
C154 "2.2nF/10V" CAP_C_1005X60 19,52.1 r270 top
C155 "2.2nF/10V" CAP_C_1005X60 6.4,61.5 r270 top
C156 "2.2nF/10V" CAP_C_1005X60 9.2,61.5 r270 top
C157 "10uF/20V" CAP_C_2012X110 33.6,59.6 r270 top
C158 "47uF/25V" CAP_C_3225X80 30.7,54.3 r180 top
C159 "47uF/25V" CAP_C_3225X80 26.1,54.3 r0 top
C160 "47uF/25V" CAP_C_3225X80 -5.9,53.9 r90 bottom
C161 "47uF/25V" CAP_C_3225X80 -5.9,58.5 r270 bottom
C162 "1uF/20V" CAP_C_1005X60 14.2,57.3 r90 top
C163 "47uF/25V" CAP_C_3225X80 -13.8,37.4 r90 bottom
C164 "47uF/25V" CAP_C_3225X80 -13.8,42 r270 bottom
C165 "1uF/20V" CAP_C_1005X60 14.2,47.9 r90 top
C166 "2.2nF/10V" CAP_C_1005X60 16.2,61.5 r270 top
C167 "2.2nF/10V" CAP_C_1005X60 19,61.5 r270 top
C168 "2.2nF/10V" CAP_C_1005X60 6.4,43.1 r270 top
C169 "2.2nF/10V" CAP_C_1005X60 9.2,43.1 r270 top
C170 "47uF/25V" CAP_C_3225X80 -13.8,46.6 r90 bottom
C171 "47uF/25V" CAP_C_3225X80 -13.8,51.2 r270 bottom
C172 "1uF/20V" CAP_C_1005X60 4.4,48.1 r90 top
C173 "2.2nF/10V" CAP_C_1005X60 6.4,52.3 r270 top
C174 "2.2nF/10V" CAP_C_1005X60 9.2,52.3 r270 top
C175 "4.7uF/10V" CAP_C_1608X80 118.3,121.9 r180 top
C176 "22uF/10V" CAP_C_1608X80 114.85,96.8 r270 top
C177 "0.1uF/10V" CAP_C_1005X60 133.3,56.6 r0 top
C178 "0.1uF/10V" CAP_C_1005X60 135.7,47.8 r0 top
C179 "0.1uF/10V" CAP_C_1005X60 131.4,43.8 r180 top
C180 "0.1uF/10V" CAP_C_1005X60 141,55.4 r90 top
C181 "0.1uF/10V" CAP_C_1005X60 155.379,71.475 r180 top
C182 "10uF/20V" CAP_C_2012X110 25.1,28.7 r270 top
C183 "10uF/20V" CAP_C_2012X110 31.9,28.7 r270 top
C184 "0.1uF/10V" CAP_C_1005X60 109.6,59.625 r90 top
C185 "0.1uF/10V" CAP_C_1005X60 98.9,60 r90 top
C186 "0.1uF/10V" CAP_C_1005X60 89.4,60.6 r180 top
C187 "0.1uF/10V" CAP_C_1005X60 71,69.875 r270 top
C188 "0.1uF/10V" CAP_C_1005X60 56.7,71.8 r270 top
C189 "0.1uF/10V" CAP_C_1005X60 52.427,71.8 r270 top
C190 "4.7uF/10V" CAP_C_1608X80 94.725,101.75 r180 top
C191 "0.1uF/10V" CAP_C_1005X60 141.7,46.9 r180 top
C192 "0.1uF/10V" CAP_C_1005X60 80.7,92.9 r90 top
C193 "0.1uF/10V" CAP_C_1005X60 14.6,69.355 r90 bottom
C194 "0.1uF/10V" CAP_C_1005X60 18,69.355 r90 bottom
C195 "0.1uF/10V" CAP_C_1005X60 101.9,21.5 r90 top
C196 "0.1uF/10V" CAP_C_1005X60 101.9,26.3 r270 top
C197 "0.1uF/10V" CAP_C_1005X60 155.379,72.625 r180 top
C198 "0.1uF/10V" CAP_C_1005X60 166.9,57.7 r180 top
C199 "0.1uF/10V" CAP_C_1005X60 166.9,58.6 r180 top
C200 "0.1uF/10V" CAP_C_1005X60 162.2,60.6 r180 top
C201 "0.1uF/10V" CAP_C_1005X60 164.2,60.6 r0 top
C202 "0.1uF/10V" CAP_C_1005X60 167.5,68.1 r180 top
C203 "0.1uF/10V" CAP_C_1005X60 167.5,72 r180 top
C204 "150pF/10V" CAP_C_1005X60 275.933,13.821 r90 top
C205 "150pF/10V" CAP_C_1005X60 191.875,8.471 r90 top
C206 "150pF/10V" CAP_C_1005X60 190.725,8.471 r90 top
C207 "150pF/10V" CAP_C_1005X60 262.133,13.821 r90 top
C208 "150pF/10V" CAP_C_1005X60 265.583,13.821 r90 top
C209 "150pF/10V" CAP_C_1005X60 267.883,13.821 r90 top
C210 "150pF/10V" CAP_C_1005X60 225.225,8.471 r90 top
C211 "150pF/10V" CAP_C_1005X60 233.275,8.471 r90 top
C212 "150pF/10V" CAP_C_1005X60 232.125,8.471 r90 top
C213 "150pF/10V" CAP_C_1005X60 235.575,8.471 r90 top
C214 "150pF/10V" CAP_C_1005X60 181.799,4.5 r90 top
C215 "150pF/10V" CAP_C_1005X60 234.425,8.471 r90 top
C216 "150pF/10V" CAP_C_1005X60 205.675,8.471 r90 top
C217 "150pF/10V" CAP_C_1005X60 204.525,8.471 r90 top
C218 "150pF/10V" CAP_C_1005X60 207.975,8.471 r90 top
C219 "150pF/10V" CAP_C_1005X60 206.825,8.471 r90 top
C220 "4.7uF/10V" CAP_C_1608X80 220.714,13.421 r90 top
C221 "4.7uF/10V" CAP_C_1608X80 218.989,13.421 r90 top
C222 "0.1uF/10V" CAP_C_1005X60 201.075,8.471 r90 top
C223 "0.1uF/10V" CAP_C_1005X60 202.225,8.471 r90 top
C224 "22uF/10V" CAP_C_1608X80 217.264,13.421 r90 top
C225 "4.7uF/10V" CAP_C_1608X80 222.439,13.421 r90 top
C226 "22uF/10V" CAP_C_1608X80 227.614,13.421 r90 top
C227 "4.7uF/10V" CAP_C_1608X80 225.889,13.421 r90 top
C228 "22uF/10V" CAP_C_1608X80 224.164,13.421 r90 top
C229 "4.7uF/10V" CAP_C_1608X80 212.089,13.421 r90 top
C230 "4.7uF/10V" CAP_C_1608X80 210.364,13.421 r90 top
C231 "4.7uF/10V" CAP_C_1608X80 215.539,13.421 r90 top
C232 "4.7uF/10V" CAP_C_1608X80 213.814,13.421 r90 top
C233 "4.7uF/10V" CAP_C_1608X80 182.099,48.6 r90 top
C234 "4.7uF/10V" CAP_C_1608X80 241.414,13.421 r90 top
C235 "4.7uF/10V" CAP_C_1005X60 86.674,50.95 r0 top
C236 "0.1uF/10V" CAP_C_0603x30 86.5,49.9 r0 top
C237 "0.1uF/10V" CAP_C_0603x30 83.9,48 r180 top
C238 "0.1uF/10V" CAP_C_0603x30 84.2,49.7 r90 top
C239 "0.1uF/10V" CAP_C_0603x30 83.9,47.5 r180 top
C240 "0.1uF/10V" CAP_C_0603x30 83.9,47 r180 top
C241 "0.1uF/10V" CAP_C_0603x30 76.4,45.1 r180 top
C242 "0.1uF/10V" CAP_C_0603x30 74.4,45.8 r180 top
C243 "0.1uF/10V" CAP_C_0603x30 86.2,45.7 r0 top
C244 "0.1uF/10V" CAP_C_0603x30 86.1,47.7 r0 top
C245 "0.1uF/10V" CAP_C_0603x30 82.3,49.6 r90 top
C246 "0.1uF/10V" CAP_C_0603x30 81.6,47.7 r90 top
C247 "0.1uF/10V" CAP_C_0603x30 86.2,43.8 r0 top
C248 "0.1uF/10V" CAP_C_0603x30 84.2,45.1 r0 top
C249 "0.1uF/10V" CAP_C_0603x30 79.1,47.6 r90 top
C250 "4.7uF/10V" CAP_C_1005X60 81.1,38.1 r270 top
C251 "0.1uF/10V" CAP_C_0603x30 80.3,49.662 r90 top
C252 "0.1uF/10V" CAP_C_0603x30 78.3,49.6 r90 top
C253 "0.1uF/10V" CAP_C_1005X60 270.183,13.821 r90 top
C254 "0.1uF/10V" CAP_C_0603x30 76.4,49.6 r90 top
C255 "0.1uF/10V" CAP_C_0603x30 78.7,45.5 r90 top
C256 "0.1uF/10V" CAP_C_0603x30 83.8,46.4 r0 top
C257 "0.1uF/10V" CAP_C_0603x30 81.9,42.175 r270 top
C258 "0.1uF/10V" CAP_C_0603x30 81.6,45.6 r90 top
C259 "0.1uF/10V" CAP_C_0603x30 76.4,46.7 r270 top
C260 "0.1uF/10V" CAP_C_0603x30 76.7,47.7 r0 top
C261 "0.1uF/10V" CAP_C_0603x30 83.1,40.3 r270 top
C262 "0.1uF/10V" CAP_C_0603x30 83.55,43 r90 top
C263 "0.1uF/10V" CAP_C_0603x30 74.4,47.7 r180 top
C264 "0.1uF/10V" CAP_C_0603x30 74.1,50 r180 top
C265 "0.1uF/10V" CAP_C_0603x30 80.3,38 r270 top
C266 "4.7uF/10V" CAP_C_1005X60 74.1,50.7 r180 top
C267 "4.7uF/10V" CAP_C_1005X60 86.15,42.5 r0 top
C268 "0.1uF/10V" CAP_C_0603x30 86.5,37.6 r270 top
C269 "0.1uF/10V" CAP_C_0603x30 86.1,39.9 r0 top
C270 "0.1uF/10V" CAP_C_0603x30 86.1,41.8 r0 top
C271 "18pF/10V" CAP_C_1005X60 196.475,8.471 r90 top
C272 "0.1uF/10V" CAP_C_0603x30 84.2,37.9 r270 top
C273 "0.1uF/10V" CAP_C_1005X60 194.175,8.471 r90 top
C274 "0.1uF/10V" CAP_C_0603x30 83.2,41.2 r180 top
C275 "0.1uF/10V" CAP_C_0603x30 83.812,39.9 r180 top
C276 "0.1uF/10V" CAP_C_0603x30 84.2,40.9 r90 top
C277 "2.2uF/10V" CAP_C_0603x30 81.6,39.9 r270 top
C278 "18pF/10V" CAP_C_1005X60 277.083,13.821 r90 top
C279 "0.1uF/10V" CAP_C_0603x30 280.533,13.821 r90 top
C280 "4.7uF/10V" CAP_C_1005X60 236.239,13.421 r90 top
C281 "0.1uF/10V" CAP_C_0603x30 77.962,43.8 r180 top
C282 "20pF/10V" CAP_C_1005X60 187.275,8.471 r90 top
C283 "0.1uF/10V" CAP_C_0603x30 77.3,46.4 r0 top
C284 "0.1uF/10V" CAP_C_0603x30 77.3,47.2 r0 top
C285 "0.1uF/10V" CAP_C_1005X60 242.475,8.471 r90 top
C286 "20pF/10V" CAP_C_1005X60 210.275,6.221 r90 top
C287 "0.1uF/10V" CAP_C_1005X60 211.425,6.221 r90 top
C288 "2.2uF/10V" CAP_C_1608X80 182.099,24.1 r90 top
C289 "0.1uF/10V" CAP_C_1005X60 181.799,36.5 r90 top
C290 "0.1uF/10V" CAP_C_1005X60 209.125,6.221 r90 top
C292 "4.7uF/10V" CAP_C_1608X80 234.514,13.421 r90 top
C294 "0.1uF/10V" CAP_C_1005X60 206.825,6.221 r90 top
C296 "0.1uF/10V" CAP_C_1005X60 207.975,6.221 r90 top
C298 "0.1uF/10V" CAP_C_1005X60 216.025,6.221 r90 top
C300 "0.1uF/10V" CAP_C_1005X60 217.175,6.221 r90 top
C302 "0.1uF/10V" CAP_C_1005X60 214.875,6.221 r90 top
C304 "0.1uF/10V" CAP_C_1005X60 212.575,6.221 r90 top
C306 "0.1uF/10V" CAP_C_1005X60 213.725,6.221 r90 top
C308 "0.1uF/10V" CAP_C_1005X60 205.675,6.221 r90 top
C310 "0.1uF/10V" CAP_C_1005X60 197.625,6.221 r90 top
C312 "0.1uF/10V" CAP_C_1005X60 198.775,6.221 r90 top
C314 "0.1uF/10V" CAP_C_1005X60 196.475,6.221 r90 top
C316 "0.1uF/10V" CAP_C_1005X60 194.175,6.221 r90 top
C318 "0.1uF/10V" CAP_C_1005X60 195.325,6.221 r90 top
C320 "0.1uF/10V" CAP_C_1005X60 203.375,6.221 r90 top
C322 "0.1uF/10V" CAP_C_1005X60 204.525,6.221 r90 top
C324 "0.1uF/10V" CAP_C_1005X60 202.225,6.221 r90 top
C326 "0.1uF/10V" CAP_C_1005X60 199.925,6.221 r90 top
C328 "0.1uF/10V" CAP_C_1005X60 201.075,6.221 r90 top
C330 "4.7uF/10V" CAP_C_1608X80 237.964,13.421 r90 top
C331 "0.1uF/10V" CAP_C_1005X60 234.425,6.221 r90 top
C332 "0.1uF/10V" CAP_C_0603x30 79,39.9 r270 top
C333 "0.1uF/10V" CAP_C_0603x30 78.65,42.15 r180 top
C334 "0.1uF/10V" CAP_C_0603x30 79.8,43.8 r0 top
C335 "0.1uF/10V" CAP_C_0603x30 79.3,45.5 r90 top
C336 "0.1uF/10V" CAP_C_0603x30 78.4,38 r270 top
C337 "0.1uF/10V" CAP_C_0603x30 78,45.4 r90 top
C338 "0.1uF/10V" CAP_C_0603x30 77.1,40.2 r270 top
C339 "0.1uF/10V" CAP_C_1005X60 236.725,6.221 r90 top
C340 "0.1uF/10V" CAP_C_0603x30 77.4,41.5 r0 top
C341 "0.1uF/10V" CAP_C_0603x30 76.4,42.5 r180 top
C342 "0.1uF/10V" CAP_C_0603x30 76.4,37.9 r270 top
C343 "4.7uF/10V" CAP_C_1608X80 244.864,13.421 r90 top
C344 "0.1uF/10V" CAP_C_0603x30 76.862,39.4 r0 top
C345 "0.1uF/10V" CAP_C_0603x30 76.2,40.9 r90 top
C346 "0.1uF/10V" CAP_C_0603x30 74.563,41.8 r180 top
C347 "0.1uF/10V" CAP_C_1005X60 219.475,6.221 r90 top
C348 "0.1uF/10V" CAP_C_0603x30 74.2,37.6 r270 top
C349 "0.1uF/10V" CAP_C_0603x30 74.5,39.9 r0 top
C350 "4.7uF/10V" CAP_C_1005X60 74.45,42.5 r180 top
C353 "0.1uF/10V" CAP_C_1005X60 181.799,4.5 r90 top
C354 "0.1uF/10V" CAP_C_1005X60 226.375,6.221 r90 top
D1 "SS54" DO-214AC_SMA 21.4,31.1 r90 top
D2 "USBLC6-2SC6" SOT95P280X145-6N 22.9,14.6 r0 top
D3 "USBLC6-2SC6" SOT95P280X145-6N 22.824,11.07 r0 top
D4 "USBLC6-2SC6" SOT95P280X145-6N 14.6,68.1 r90 top
D5 "USBLC6-2SC6" SOT95P280X145-6N 18,68.1 r90 top
D6 "1N4007FL" SOD3717X145N 57,18.4 r90 top value=1N5007
D7 "1N4007FL" SOD3717X145N 57,12.5 r90 top value=1N5007
D8 "1N4007FL" SOD3717X145N 63,18.5 r90 top value=1N5007
D9 "1N4007FL" SOD3717X145N 63.1,12.5 r90 top value=1N5007
D10 "SS54" DO-214AC_SMA 21.4,40.3 r90 top
D11 "SS54" DO-214AC_SMA 11.6,31.6 r90 top
D12 "SS54" DO-214AC_SMA 21.4,49.7 r90 top
D13 "SS54" DO-214AC_SMA 11.6,59.1 r90 top
D14 "SS54" DO-214AC_SMA 21.4,59.1 r90 top
D15 "SS54" DO-214AC_SMA 11.6,40.7 r90 top
D16 "SS54" DO-214AC_SMA 11.6,49.9 r90 top
D17 "1N4007FL" SOD3717X145N 89.5,11.3 r0 bottom value=1N5007
D18 "1N4007FL" SOD3717X145N 84.7,11.3 r0 bottom value=1N5007
D19 "1N4007FL" SOD3717X145N 79.9,11.3 r0 bottom value=1N5007
D20 "1N4007FL" SOD3717X145N 75,11.3 r0 bottom value=1N5007
D21 "1N4007FL" SOD3717X145N 108.7,11.3 r0 bottom value=1N5007
D22 "1N4007FL" SOD3717X145N 103.9,11.3 r0 bottom value=1N5007
D23 "1N4007FL" SOD3717X145N 99.1,11.3 r0 bottom value=1N5007
D24 "1N4007FL" SOD3717X145N 94.3,11.3 r0 bottom value=1N5007
D25 "1N4007FL" SOD3717X145N 92.8,11.3 r180 top value=1N5007
D26 "1N4007FL" SOD3717X145N 97.6,11.3 r180 top value=1N5007
D27 "1N4007FL" SOD3717X145N 102.4,11.3 r180 top value=1N5007
D28 "1N4007FL" SOD3717X145N 107.2,11.3 r180 top value=1N5007
D29 "1N4007FL" SOD3717X145N 69.4,11 r0 bottom value=1N5007
D30 "1N4007FL" SOD3717X145N 64.4,11 r0 bottom value=1N5007
D31 "1N4007FL" SOD3717X145N 59.4,11 r0 bottom value=1N5007
D32 "1N4007FL" SOD3717X145N 44,6.4 r90 bottom value=1N5007
D33 "_LED_RED" LED_0603 182.099,16.5 r90 top
D34 "_LED_RED" LED_0603 208.639,13.421 r90 top
D35 "_LED_RED" LED_0603 206.914,13.421 r90 top
DZ1 "KDZLVTFTR51" SOD3717X145N 89.5,13.5 r0 bottom
DZ2 "KDZLVTFTR51" SOD3717X145N 84.7,13.5 r0 bottom
DZ3 "KDZLVTFTR51" SOD3717X145N 79.9,13.5 r0 bottom
DZ4 "KDZLVTFTR51" SOD3717X145N 75,13.5 r0 bottom
DZ5 "KDZLVTFTR51" SOD3717X145N 108.7,13.5 r0 bottom
DZ6 "KDZLVTFTR51" SOD3717X145N 103.9,13.5 r0 bottom
DZ7 "KDZLVTFTR51" SOD3717X145N 99.1,13.5 r0 bottom
DZ8 "KDZLVTFTR51" SOD3717X145N 94.3,13.5 r0 bottom
DZ9 "KDZLVTFTR51" SOD3717X145N 92.8,13.5 r180 top
DZ10 "KDZLVTFTR51" SOD3717X145N 97.6,13.5 r180 top
DZ11 "KDZLVTFTR51" SOD3717X145N 102.4,13.5 r180 top
DZ12 "KDZLVTFTR51" SOD3717X145N 107.2,13.5 r180 top
DZ13 "KDZLVTFTR51" SOD3717X145N 69.4,13.2 r0 bottom
DZ14 "KDZLVTFTR51" SOD3717X145N 64.4,13.2 r0 bottom
DZ15 "KDZLVTFTR51" SOD3717X145N 59.4,13.2 r0 bottom
DZ16 "KDZLVTFTR51" SOD3717X145N 41.8,6.4 r90 bottom
H2 "M3" HEX-M3_NoVia 257.195,26.521 r0 top
H3 "M3" HEX-M3_NoVia 250.345,26.521 r0 top
H4 "M3" HEX-M3_NoVia 243.495,26.521 r0 top
H5 "M3" HEX-M3_NoVia 270.895,26.521 r0 top
H7 "M3" HEX-M3_NoVia 264.045,26.521 r0 top
H8 "M3" HEX-M3_NoVia 236.645,26.521 r0 top
H9 "M3" HEX-M3_NoVia 216.095,26.521 r0 top
H10 "M3" HEX-M3_NoVia 4,4 r0 top
H11 "M3" HEX-M3_NoVia 4,76 r0 top
H12 "M3" HEX-M3_NoVia 222.945,26.521 r0 top
H13 "M3" HEX-M3_NoVia 176,4 r0 top
H14 "M3" HEX-M3_NoVia 176,76 r0 top
H15 "M3" HEX-M3_NoVia 229.795,26.521 r0 top
H16 "M3" Testpoint_TH_D450H250 194.775,12.271 r0 top
J1 "5040501191" MOLEX_5040501191 20,5 r180 top locked
J2 "Header 8x1" Header_254P_8x1 174,61.19 r270 top
J3 "0532610571" MOLEX_0532610571 20,77 r0 bottom locked
J4 "0532610571" MOLEX_0532610571 20,77 r180 top locked
J5 "5040500891" MOLEX_5040500891 127,5 r180 top
J6 "5040500891" MOLEX_5040500891 55,5 r180 top
J7 "5040500891" MOLEX_5040500891 109,5 r0 bottom
J8 "5040500891" MOLEX_5040500891 109,5 r180 top
J9 "5040500891" MOLEX_5040500891 145,5 r180 top
J10 "5040500891" MOLEX_5040500891 163,5 r180 top
J11 "0532610671" MOLEX_0532610671 137,75.9 r180 top locked
J12 "0532610671" MOLEX_0532610671 137,75.9 r0 bottom
J13 "0532610471" MOLEX_0532610471 124,75.7 r180 top locked
J14 "0473460001" 47346-0001_MOL 39.15,4.08 r0 top
J15 "Molex_1051620001" Molex_1051620001 13.018,18.25 r270 top locked
J16 "0532610471" MOLEX_0532610471 33,76 r180 top locked
J17 "0532610471" MOLEX_0532610471 124,75.7 r0 bottom
J18 "5040500891" MOLEX_5040500891 73,5 r180 top
J19 "0532610271" MOLEX_0532610271 165,77 r0 top
J20 "0532610971" MOLEX_0532610971 108.8,76.7 r0 bottom
J21 "0532610971" MOLEX_0532610971 108.8,76.7 r180 top locked
J22 "0532610971" MOLEX_0532610971 48,77 r180 top locked
J23 "Header 8x1" Header_254P_8x1 45.23,14.3 r180 top
J24 "0532611171" MOLEX_0532611171 88.8,76.7 r180 top locked
J25 "0532611171" MOLEX_0532611171 88.8,76.7 r0 bottom
J26 "0532611171" MOLEX_0532611171 67.7,77 r180 top locked
J27 "0532611171" MOLEX_0532611171 67.7,77 r0 bottom locked
J28 "5040500891" MOLEX_5040500891 73,5 r0 bottom locked
J29 "5040500891" MOLEX_5040500891 91,5 r0 bottom
J30 "5040500891" MOLEX_5040500891 91,5 r180 top
J31 "0532610671" MOLEX_0532610671 152,76 r180 top
J32 "0532610671" MOLEX_0532610671 152,76 r0 bottom
J33 "5040500891" MOLEX_5040500891 55,5 r0 bottom
JP1 "DNP/0R" RES_C_1608X60 14.5,32.4 r90 top
JP2 "DNP/0R" RES_C_1608X60 36.4,8.8 r0 top
JP3 "DNP/0R" RES_C_1608X60 14.5,41.6 r90 top
JP4 "DNP/0R" RES_C_1608X60 5.3,25.3 r0 top
JP5 "DNP/0R" RES_C_1608X60 8.2,25.3 r180 top
JP6 "DNP/0R" RES_C_1608X60 4.7,32.9 r90 top
JP7 "DNP/0R" RES_C_1608X60 14.5,51 r90 top
JP8 "DNP/0R" RES_C_1608X60 4.7,60.4 r90 top
JP9 "DNP/0R" RES_C_1608X60 14.5,60.4 r90 top
JP10 "DNP/0R" RES_C_1608X60 4.7,42 r90 top
JP11 "DNP/0R" RES_C_1608X60 4.7,51.2 r90 top
JP12 "DNP/0R" RES_C_1608X60 131.6,45.9 r180 top
L1 "1uH" L-SMD-M-3.5x3.5x2mm 135.875,22.15 r90 top
L2 "1uH" L-SMD-M-3.5x3.5x2mm 135.775,13.25 r90 top
L3 "1uH" L-SMD-M-3.5x3.5x2mm 125.425,21.75 r90 top
L4 "1uH" L-SMD-M-3.5x3.5x2mm 125.461,12.868 r90 top
L5 "Inductor" IND_C_1008 196.999,1.5 r0 top value=1.5uH
L6 "Inductor" IND_C_1008 192.399,1.5 r0 top value=1.5uH
L7 "Inductor" IND_C_1008 187.699,1.5 r0 top value=1.5uH
L8 "Inductor" IND_C_1008 182.999,1.5 r0 top value=1.5uH
Q1 "DMG302PU-7" SOT95P240X120-3N 6.4,65.564 r0 top
Q2 "DMG302PU-7" SOT95P240X120-3N 6.4,69.764 r0 top
Q3 "AO3400A" SOT95P240X120-3N 60,19.4 r90 top
Q4 "AO3400A" SOT95P240X120-3N 60,13.5 r90 top
Q5 "AO3400A" SOT95P240X120-3N 66,19.5 r90 top
Q6 "AO3400A" SOT95P240X120-3N 66.1,13.5 r90 top
Q7 "AO3400A" SOT95P240X120-3N 89.2,16.3 r180 bottom
Q8 "AO3400A" SOT95P240X120-3N 84.4,16.3 r180 bottom
Q9 "AO3400A" SOT95P240X120-3N 79.6,16.3 r180 bottom
Q10 "AO3400A" SOT95P240X120-3N 74.6,16.3 r180 bottom
Q11 "AO3400A" SOT95P240X120-3N 108.4,16.3 r180 bottom
Q12 "AO3400A" SOT95P240X120-3N 103.6,16.3 r180 bottom
Q13 "AO3400A" SOT95P240X120-3N 98.8,16.3 r180 bottom
Q14 "AO3400A" SOT95P240X120-3N 94,16.3 r180 bottom
Q15 "AO3400A" SOT95P240X120-3N 93.1,16.3 r0 top
Q16 "AO3400A" SOT95P240X120-3N 97.9,16.3 r0 top
Q17 "AO3400A" SOT95P240X120-3N 102.7,16.3 r0 top
Q18 "AO3400A" SOT95P240X120-3N 107.5,16.3 r0 top
Q19 "AO3400A" SOT95P240X120-3N 69,16 r180 bottom
Q20 "AO3400A" SOT95P240X120-3N 64,16 r180 bottom
Q21 "AO3400A" SOT95P240X120-3N 59,16 r180 bottom
Q22 "AO3400A" SOT95P240X120-3N 39,6 r270 bottom
Q23 "Transistor MOS-N GSD" SOT-23-3 182.999,4 r90 top value=BSS138N
R1 "470k" RES_C_1005X40 15.1,29.3 r90 top
R2 "47k" RES_C_1005X40 18.7,27.1 r270 top
R3 "47k" RES_C_1005X40 19.6,27.1 r270 top
R4 "22R" RES_C_1005X40 16.4,27.1 r270 top
R5 "DNP/10k" RES_C_1005X40 15.5,27.1 r270 top
R6 "133k" RES_C_1005X40 14.2,27.1 r270 top
R7 "10k" RES_C_1005X40 17.3,27.1 r270 top
R8 "1.6k" RES_C_1005X40 17.1,33.5 r270 top
R9 "22R" RES_C_1005X40 149.9,39.7 r0 bottom
R10 "22R" RES_C_1005X40 149.9,42.4 r0 bottom
R11 "22R" RES_C_1005X40 128.5,32.7 r90 bottom
R12 "22R" RES_C_1005X40 149.9,45.1 r0 bottom
R13 "22R" RES_C_1005X40 149.9,46.9 r0 bottom
R14 "22R" RES_C_1005X40 149.9,55.9 r0 bottom
R15 "22R" RES_C_1005X40 149.9,59.5 r0 bottom
R16 "22R" RES_C_1005X40 142,32.7 r270 bottom
R17 "22R" RES_C_1005X40 149.9,57.7 r0 bottom
R18 "22R" RES_C_1005X40 143.4,63.3 r90 bottom
R19 "22R" RES_C_1005X40 141.6,63.3 r90 bottom
R20 "22R" RES_C_1005X40 149.9,43.3 r180 bottom
R21 "22R" RES_C_1005X40 144.3,63.3 r90 bottom
R22 "22R" RES_C_1005X40 149.9,46 r180 bottom
R23 "22R" RES_C_1005X40 128.2,63.3 r90 bottom
R24 "22R" RES_C_1005X40 132.7,63.3 r90 bottom
R25 "22R" RES_C_1005X40 131.8,63.3 r90 bottom
R26 "22R" RES_C_1005X40 129.4,32.7 r90 bottom
R27 "22R" RES_C_1005X40 120,51.6 r180 bottom
R28 "22R" RES_C_1005X40 142.5,63.3 r270 bottom
R29 "22R" RES_C_1005X40 140.7,63.3 r270 bottom
R30 "22R" RES_C_1005X40 123.7,63.3 r90 bottom
R31 "22R" RES_C_1005X40 138.9,63.3 r270 bottom
R32 "22R" RES_C_1005X40 129.1,63.3 r90 bottom
R33 "22R" RES_C_1005X40 136.3,63.3 r90 bottom
R34 "22R" RES_C_1005X40 138,63.3 r90 bottom
R35 "22R" RES_C_1005X40 139.8,63.3 r90 bottom
R36 "22R" RES_C_1005X40 146.1,63.3 r90 bottom
R37 "22R" RES_C_1005X40 130,63.3 r270 bottom
R38 "22R" RES_C_1005X40 143.8,32.7 r270 bottom
R39 "22R" RES_C_1005X40 149.9,60.4 r180 bottom
R40 "22R" RES_C_1005X40 131.2,32.7 r270 bottom
R41 "22R" RES_C_1005X40 141.1,32.7 r270 bottom
R42 "22R" RES_C_1005X40 139.3,32.7 r270 bottom
R43 "22R" RES_C_1005X40 120,39.9 r0 bottom
R44 "10k" RES_C_1005X40 145,52 r0 top
R45 "22R" RES_C_1005X40 145,49.2 r0 top
R46 "0R" RES_C_1005X40 145,51.1 r180 top
R47 "22R" RES_C_1005X40 124.6,63.3 r90 bottom
R48 "22R" RES_C_1005X40 125.5,63.3 r90 bottom
R49 "22R" RES_C_1005X40 126.4,63.3 r90 bottom
R50 "22R" RES_C_1005X40 127.3,63.3 r90 bottom
R51 "22R" RES_C_1005X40 132.1,32.7 r90 bottom
R52 "22R" RES_C_1005X40 133,32.7 r90 bottom
R53 "22R" RES_C_1005X40 130.9,63.3 r90 bottom
R54 "22R" RES_C_1005X40 149.9,53.2 r0 bottom
R55 "22R" RES_C_1005X40 149.9,51.4 r0 bottom
R56 "22R" RES_C_1005X40 120,39 r0 bottom
R57 "22R" RES_C_1005X40 149.9,47.8 r0 bottom
R58 "22R" RES_C_1005X40 149.9,44.2 r0 bottom
R59 "22R" RES_C_1005X40 149.9,37.9 r180 bottom
R60 "DNP/22R" RES_C_1005X40 147.4,32.7 r90 bottom
R61 "22R" RES_C_1005X40 149.9,54.1 r180 bottom
R62 "22R" RES_C_1005X40 146.5,32.7 r90 bottom
R63 "22R" RES_C_1005X40 149.9,48.7 r180 bottom
R64 "22R" RES_C_1005X40 120,35.6 r0 bottom
R65 "22R" RES_C_1005X40 149.9,41.5 r0 bottom
R66 "22R" RES_C_1005X40 120,36.8 r0 bottom
R67 "22R" RES_C_1005X40 149.9,38.8 r0 bottom